# EAGLE board avr_programming_shield_Zif (EAGLE 6.3)
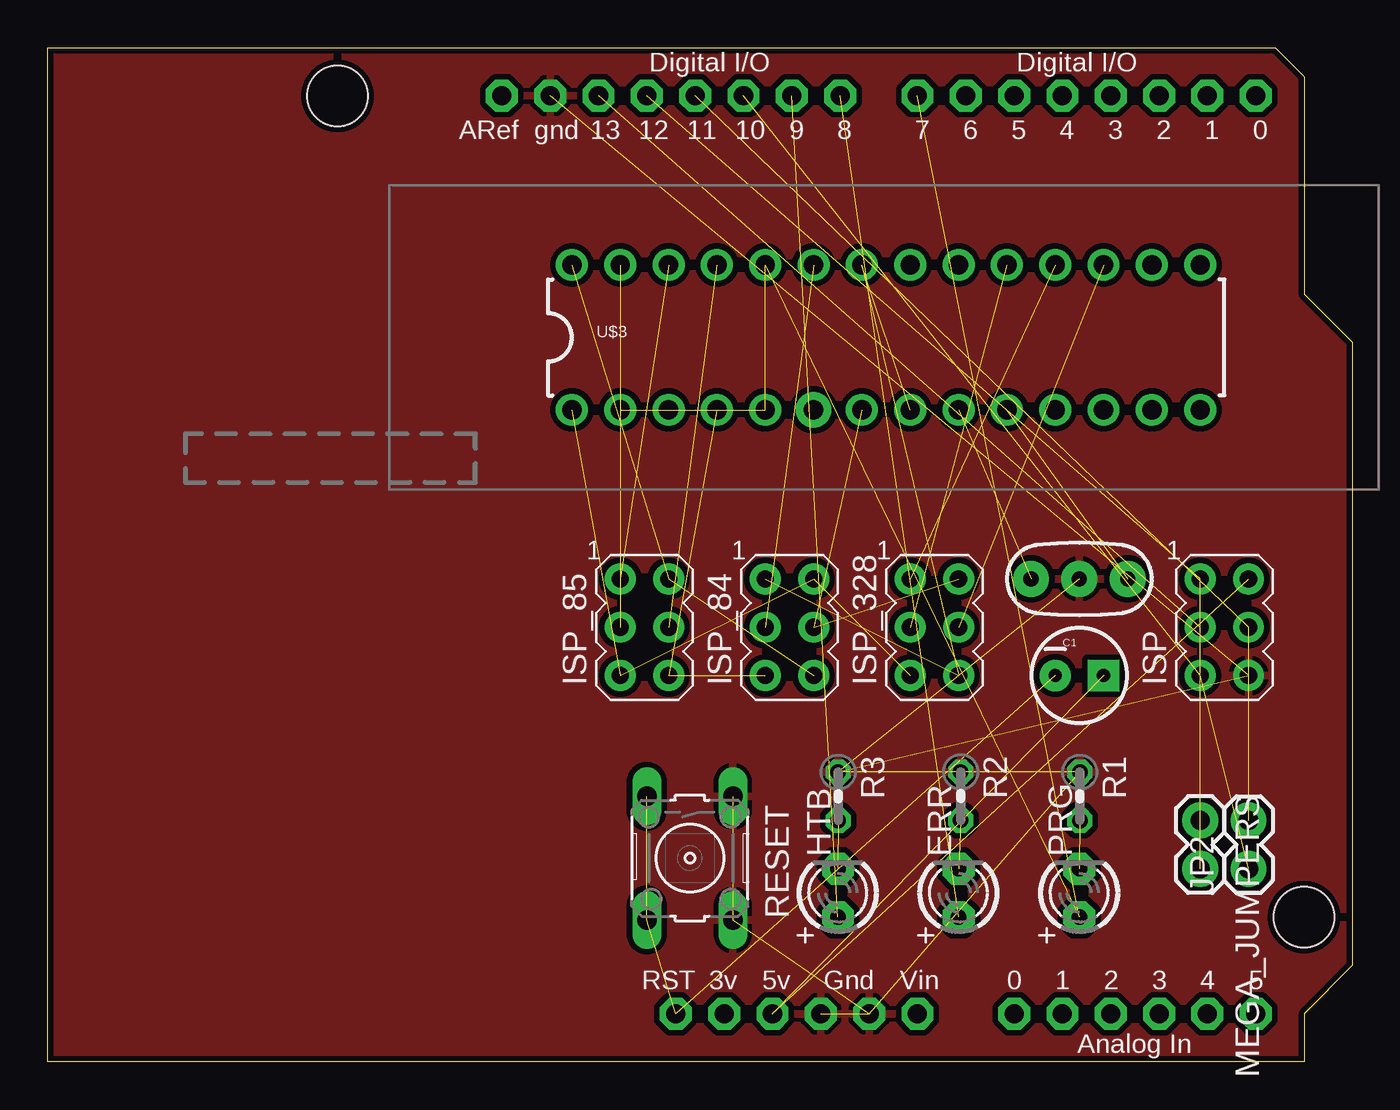
[diagram p0: board, top side]
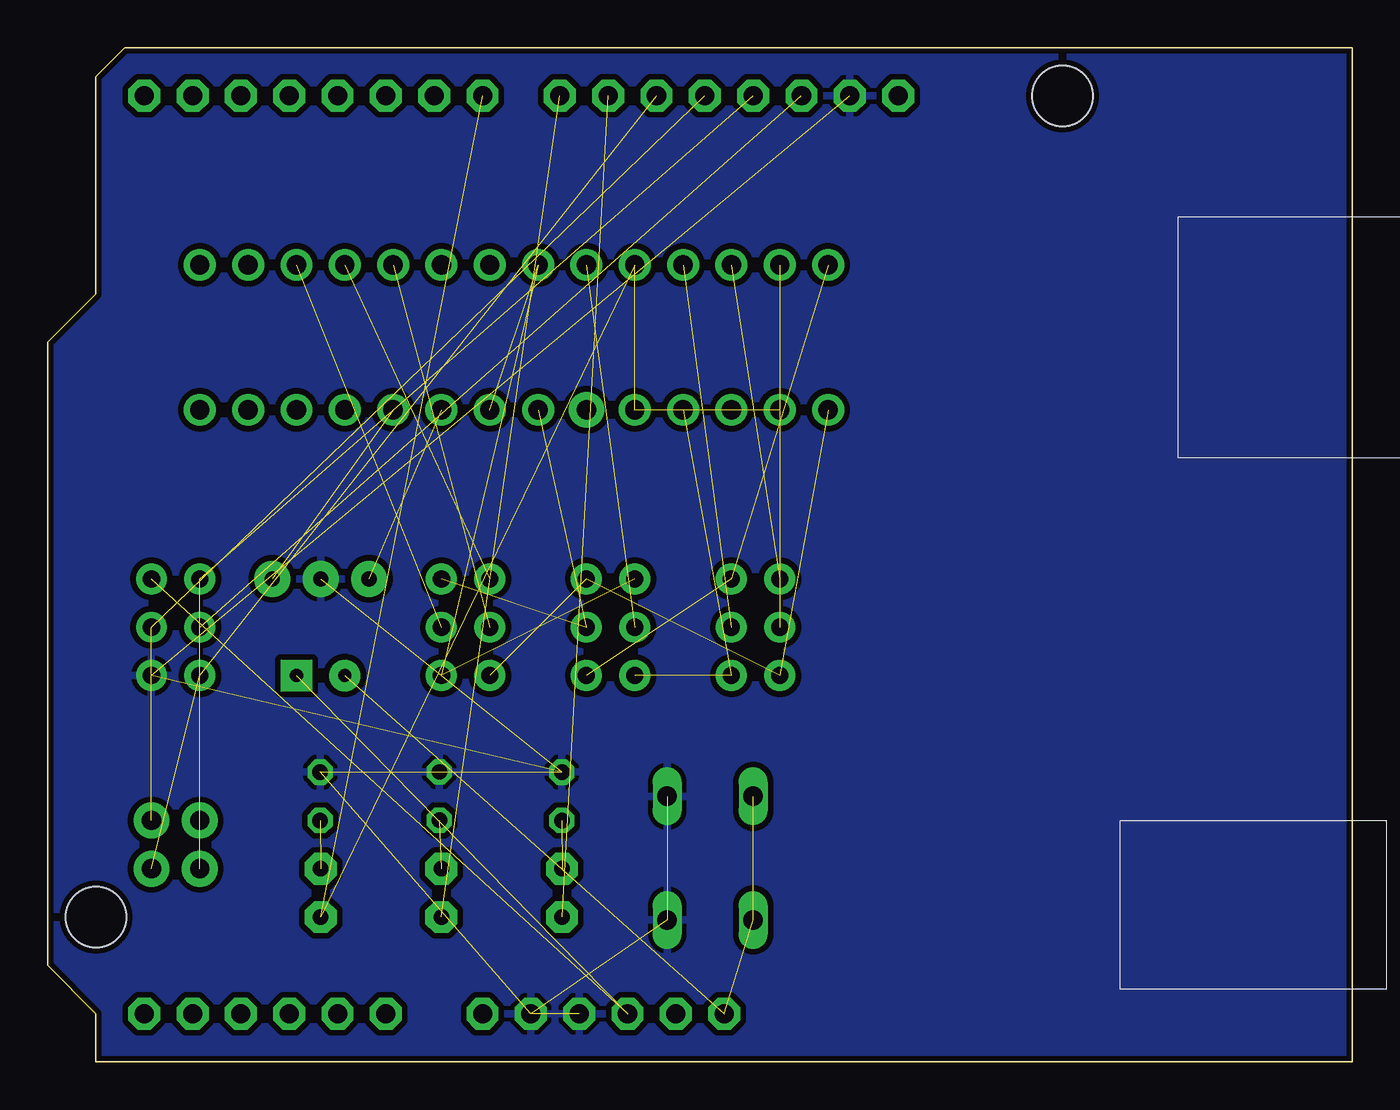
[diagram p1: board, bottom side, seen from below]

Size 68.58 x 53.34 mm. Coordinates in mm from the lower left corner, seen from the top.
Outline: 0,53.34 64.52,53.34 66.04,51.82 66.04,40.39 68.58,37.85 68.58,5.08 66.04,2.54 66.04,0 0,0 0,53.34
Copper layers (1*16): Top 0.035mm / dielectric 1.5mm / Bottom 0.035mm
Design rules "default *": minimum track width 12mil, minimum drill 19mil, track to track 12mil, track to pad 12mil, pad to pad 12mil, via to via 12mil, smd to smd 0mil, copper to edge 12mil, drill to drill 8mil, minimum pad ring 10mil, minimum via ring 8mil, stop-mask expansion 4mil, vias tented up to drill 20mil, thermal gap 10mil
Net classes: 1 power: width 0.61 mm
Holes 3.2 mm at 66.04,7.62 15.24,50.8

## Footprints (pad centres in the part's own frame; a part is rotated, then mirrored left to right if it is on the bottom)
RESONATOR-PTH = drill 0.8 pad 1.88: 1 -2.54,0; 2 0,0; 3 2.54,0
CPOL-RADIAL-10UF-25V = drill 0.7 pad 1.651 square: 1 1.27,0 | drill 0.7 pad 1.651: 2 -1.27,0
LED3MM = drill 0.813 pad 1.676 octagon: A -1.27,0; K 1.27,0
AVRISP = drill 0.9 pad 1.626: 1 -1.27,2.54; 2 1.27,2.54; 3 -1.27,0; 4 1.27,0; 5 -1.27,-2.54; 6 1.27,-2.54
1X02 = drill 1.016 pad 1.88: 1 0,0; 2 2.54,0
0204V = drill 0.813 octagon: 1 -1.27,0; 2 1.27,0
B3F-10XX = drill 1.016 long: 1 -3.251,2.261; 2 3.251,2.261; 3 -3.251,-2.261; 4 3.251,-2.261
ARDUINO-NOHOLE = drill 1 pad 1.676 octagon: 3V 35.56,2.54; 5V 38.1,2.54; A0 50.8,2.54; A1 53.34,2.54; A2 55.88,2.54; A3 58.42,2.54; A4 60.96,2.54; A5 63.5,2.54; AREF 23.876,50.8; D0 63.5,50.8; D1 60.96,50.8; D2 58.42,50.8; D3 55.88,50.8; D4 53.34,50.8; D5 50.8,50.8; D6 48.26,50.8; D7 45.72,50.8; D8 41.656,50.8; D9 39.116,50.8; D10 36.576,50.8; D11 34.036,50.8; D12 31.496,50.8; D13 28.956,50.8; GND 26.416,50.8; GND1 43.18,2.54; GND2 40.64,2.54; RESET 33.02,2.54; VIN 45.72,2.54
DIL28-3-ZIF_SOCKET = drill 1.016 pad 1.676: 1 -16.51,-3.81; 2 -13.97,-3.81; 3 -11.43,-3.81; 4 -8.89,-3.81; 5 -6.35,-3.81; 7 -1.27,-3.81; 8 1.27,-3.81; 9 3.81,-3.81; 10 6.35,-3.81; 11 8.89,-3.81; 12 11.43,-3.81; 13 13.97,-3.81; 14 16.51,-3.81; 15 16.51,3.81; 16 13.97,3.81; 17 11.43,3.81; 18 8.89,3.81; 19 6.35,3.81; 20 3.81,3.81; 21 1.27,3.81; 22 -1.27,3.81; 23 -3.81,3.81; 24 -6.35,3.81; 25 -8.89,3.81; 26 -11.43,3.81; 27 -13.97,3.81; 28 -16.51,3.81 | drill 1.016 pad 1.88: 6 -3.81,-3.81

## Placement (x,y rotation side)
16MHZ  RESONATORPTH  [RESONATOR-PTH]  54.23,25.4 0 top
C1  10uF  [CPOL-RADIAL-10UF-25V]  54.23,20.32 0 top
E$1  [OSHWLOGO_TOL_0.2]  79.12,27.05 0 top  (outside the outline)
ERR  [LED3MM]  47.88,8.89 90 top
HTB  [LED3MM]  41.54,8.89 90 top
ISP  AVRISP-6  [AVRISP]  61.85,22.86 0 top
ISP_84  AVRISP-6  [AVRISP]  38.99,22.86 0 top
ISP_85  AVRISP-6  [AVRISP]  31.37,22.86 0 top
ISP_328  AVRISP-6  [AVRISP]  46.61,22.86 0 top
JP2  [1X02]  63.12,10.16 90 top
MEGA_JUMPERS  [1X02]  60.58,12.7 270 top
PRG  [LED3MM]  54.23,8.89 90 top
R1  [0204V]  54.25,13.97 270 top
R2  [0204V]  47.99,13.98 270 top
R3  [0204V]  41.55,13.97 270 top
RESET  [B3F-10XX]  33.76,10.72 270 top
U$1  ARDUINO-NOHOLE  [ARDUINO-NOHOLE]  0,0 0 top
U$3  ZIFSOCKET-28-3ZIFFSOCKET-28-3  [DIL28-3-ZIF_SOCKET]  44.07,38.1 0 top

## Library data of the parts
16MHZ C1 JP2 MEGA_JUMPERS = SparkFun
E$1 ERR HTB ISP ISP_84 ISP_85 ISP_328 PRG R1-R3 U$1 = adafruit
RESET = switch-omron
U$3 = SparkFun-Connectors_mod

## Nets
3V: U$1.3V
COMMON_D3: PRG.A U$1.D7 U$3.2 U$3.5 U$3.24
GND [power]: 16MHZ.2 ISP.6 R1.1 R2.1 R3.1 RESET.1 RESET.2 U$1.GND U$1.GND1 U$1.GND2
N$1: ISP_328.4 U$3.17
N$2: ISP.3 MEGA_JUMPERS.2 U$1.D13
N$3: ISP.1 MEGA_JUMPERS.1 U$1.D12
N$4: ISP_328.1 U$3.18
N$5: ISP.5 JP2.1 U$1.D10
N$6: ISP.4 JP2.2 U$1.D11
N$7: ISP_328.3 U$3.19
N$8: PRG.K R1.2
N$9: ERR.K R2.2
N$10: HTB.K R3.2
N$11: ISP_84.4 ISP_328.2 U$3.7
N$13: ISP_84.2 ISP_85.5 ISP_328.5 U$3.1
N$15: ISP_84.3 U$3.23
N$16: ISP_84.6 ISP_85.2 U$3.28
N$17: HTB.A U$1.D9
N$18: ISP_84.5 ISP_85.6 U$3.4
N$19: ISP_85.4 U$3.25
N$20: ISP_85.1 U$3.26
N$21: ISP_85.3 U$3.27
N$22: 16MHZ.1 U$3.9
N$24: ERR.A U$1.D8
N$25: 16MHZ.3 U$3.10
N$26: ISP_84.1 ISP_328.6 U$3.8 U$3.22
RESET: C1.2 RESET.3 RESET.4 U$1.RESET
VCC: C1.1 ISP.2 U$1.5V
VIN: U$1.VIN

## Tracks (layer width: path | path; a pad name or v marks a point on that pad's centre or on a via)
COMMON_D3  (4 unrouted)
GND  (9 unrouted)
  pour Bottom: 0,53.34 69.22,53.98 69.22,-0.51 0,0
  pour Top: 0,53.34 68.96,53.09 68.71,0.25 0,0.25
N$1  (1 unrouted)
N$2  (2 unrouted)
N$3  (2 unrouted)
N$4  (1 unrouted)
N$5  (2 unrouted)
N$6  (2 unrouted)
N$7  (1 unrouted)
N$8  (1 unrouted)
N$9  (1 unrouted)
N$10  (1 unrouted)
N$11  (2 unrouted)
N$13  (3 unrouted)
N$15  (1 unrouted)
N$16  (2 unrouted)
N$17  (1 unrouted)
N$18  (2 unrouted)
N$19  (1 unrouted)
N$20  (1 unrouted)
N$21  (1 unrouted)
N$22  (1 unrouted)
N$24  (1 unrouted)
N$25  (1 unrouted)
N$26  (3 unrouted)
RESET  (3 unrouted)
VCC  (2 unrouted)